# Altium PCB V2.PcbDoc (part 2 of 2)
Units mm, origin at the board's own origin, x right, y up, seen from the top; angles counter-clockwise.
Board outline 100.28 x 60.38 mm, 2 copper layers (Top Layer, Bottom Layer); 71 components, 64 nets, 307 pads, 74 vias.
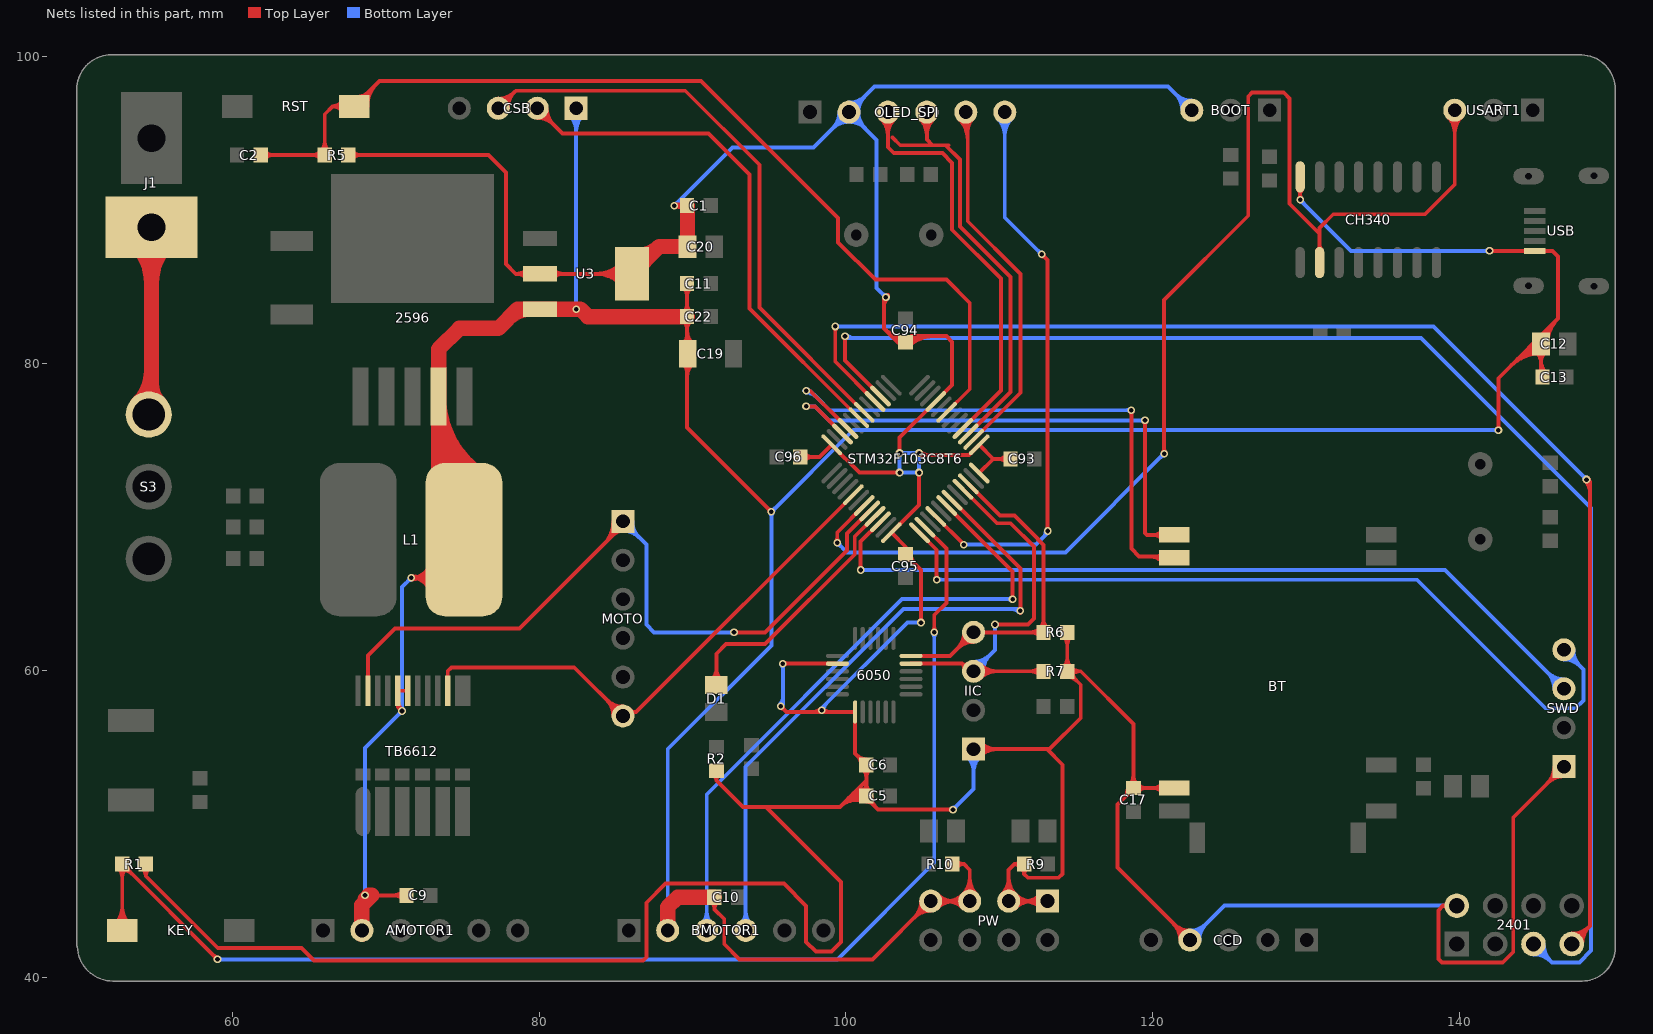
[diagram p2: the nets of this part, all layers, seen from the top]

## Via types
v1: diameter 0.5, hole 0.3, Top Layer to Bottom Layer, 69 vias
v2: diameter 4, hole 3.2, Top Layer to Bottom Layer, 4 vias
v3: diameter 0.4, hole 0.3, Top Layer to Bottom Layer, 1 vias

## Nets (pads, with @x,y where several pads share a name; then routed paths per layer and width w, separated by ;. In a path a pad name is that pad's centre, name@x,y a point inside that pad or via, vN(x,y) a via of type N, cw(c..) or ccw(c..) an arc to the next point about the centre after c; other vN are vias at no path point) (continued)
PA10: CH340.2 STM32F103C8T6.31 USART1.3 | length 94.7
  Top Layer w0.254: v1(99.441,68.326) 99.441,68.988 STM32F103C8T6.31@101.199,70.746 ; v1(120.752,74.129) 120.752,84.15 126.238,89.637 126.238,97.409 126.492,97.663 128.549,97.663 128.93,97.282 128.93,90.424 130.886,88.468 CH340.2@130.886,86.589 130.886,88.849 131.775,89.738 137.749,89.738 139.7,91.689 USART1.3@139.7,96.52 ; USART1.3@139.259,96.079 cw(c138.196,95.016) 139.7,95.016 cw(c141.204,95.016) USART1.3@140.141,96.079 ; USART1.3@139.439,96.259 cw(c138.809,95.629) 139.7,95.629 cw(c140.591,95.629) USART1.3@139.961,96.259 ; 99.441,68.623 cw(c99.144,68.623) 99.354,68.413 ccw(c99.144,68.623) 99.441,68.623 ; 99.441,68.623 ccw(c99.738,68.623) 99.528,68.413 cw(c99.738,68.623) 99.441,68.623 ; 120.752,74.426 cw(c120.455,74.426) 120.665,74.216 ccw(c120.455,74.426) 120.752,74.426 ; 120.752,74.426 ccw(c121.049,74.426) 120.839,74.216 cw(c121.049,74.426) 120.752,74.426 ; CH340.2@130.76,87.426 ccw(c130.457,87.729) 130.886,87.729 ; CH340.2@130.76,87.426 ccw(c130.457,87.729) 130.886,87.729 ; CH340.2@130.76,87.426 ccw(c130.457,87.729) 130.886,87.729 ; CH340.2@130.76,87.426 ccw(c130.457,87.729) 130.886,87.729 ; 130.886,87.729 ccw(c131.315,87.729) CH340.2@131.012,87.426 ; 130.886,87.729 ccw(c131.315,87.729) CH340.2@131.012,87.426 ; 130.886,87.729 ccw(c131.315,87.729) CH340.2@131.012,87.426 ; 130.886,87.729 ccw(c131.315,87.729) CH340.2@131.012,87.426
  Bottom Layer w0.254: v1(99.441,68.326) 100.076,67.691 114.314,67.691 v1(120.752,74.129) ; 99.651,68.116 cw(c99.861,68.326) 99.564,68.326 ccw(c99.861,68.326) 99.651,68.116 ; 99.651,68.116 ccw(c99.441,67.906) 99.441,68.203 cw(c99.441,67.906) 99.651,68.116 ; 120.542,73.919 cw(c120.752,73.709) 120.752,74.006 ccw(c120.752,73.709) 120.542,73.919 ; 120.542,73.919 ccw(c120.332,74.129) 120.629,74.129 cw(c120.332,74.129) 120.542,73.919
PA12: D1.2 STM32F103C8T6.33 | length 18.5
  Top Layer w0.254: D1.2@91.247,59.361 ccw(c90.473,60.135) 91.567,60.135 ccw(c92.661,60.135) D1.2@91.887,59.361 ; D1.2@91.567,59.041 91.567,61.087 92.202,61.722 94.742,61.722 100.584,67.564 100.584,68.717 STM32F103C8T6.33@101.906,70.039
PA15: KEY.1 R1.2 STM32F103C8T6.38 | length 96.6
  Top Layer w0.254: KEY.1@52.391,43.494 ccw(c51.328,44.557) 52.832,44.557 ccw(c54.336,44.557) KEY.1@53.273,43.494 ; KEY.1@52.571,43.314 ccw(c51.941,43.944) 52.832,43.944 ccw(c53.723,43.944) KEY.1@53.093,43.314 ; R1.2@52.585,47.107 cw(c51.989,46.511) 52.832,46.511 ; KEY.1@52.832,43.053 52.832,47.363 R1.2@52.824,47.371 52.832,47.371 v1(59.043,41.16) ; 52.832,46.549 cw(c53.621,46.549) R1.2@53.063,47.107 ; STM32F103C8T6.38@105.159,69.332 106.553,67.938 106.553,64.389 105.766,63.602 v1(105.766,62.484) ; 58.833,41.37 cw(c58.623,41.16) 58.92,41.16 ccw(c58.623,41.16) 58.833,41.37 ; 58.833,41.37 ccw(c59.043,41.58) 59.043,41.283 cw(c59.043,41.58) 58.833,41.37 ; 105.766,62.781 cw(c105.469,62.781) 105.679,62.571 ccw(c105.469,62.781) 105.766,62.781 ; 105.766,62.781 ccw(c106.063,62.781) 105.853,62.571 cw(c106.063,62.781) 105.766,62.781 ; R1.2@52.824,47.008 cw(c52.824,46.112) 53.457,46.746 ccw(c52.824,46.112) R1.2@52.824,47.008 ; R1.2@53.162,47.346 ccw(c53.898,47.346) 53.378,46.825 cw(c53.898,47.346) R1.2@53.162,47.346
  Bottom Layer w0.254: v1(59.043,41.16) 99.453,41.16 105.766,47.473 v1(105.766,62.484) ; 59.34,41.16 cw(c59.34,41.457) 59.13,41.247 ccw(c59.34,41.457) 59.34,41.16 ; 59.34,41.16 ccw(c59.34,40.863) 59.13,41.073 cw(c59.34,40.863) 59.34,41.16 ; 105.766,62.187 cw(c106.063,62.187) 105.853,62.397 ccw(c106.063,62.187) 105.766,62.187 ; 105.766,62.187 ccw(c105.469,62.187) 105.679,62.397 cw(c105.469,62.187) 105.766,62.187
PB0: CSB.3 STM32F103C8T6.18 | length 42.2
  Top Layer w0.254: CSB.3@77.343,96.647 78.486,97.79 89.535,97.79 94.361,92.964 94.361,83.666 STM32F103C8T6.18@101.199,76.828 ; CSB.3@77.343,97.016 ccw(c77.343,97.907) 77.973,97.277 ccw(c78.603,96.647) CSB.3@77.712,96.647 ; CSB.3@77.343,97.27 ccw(c77.343,98.774) 78.407,97.711 ccw(c79.47,96.647) CSB.3@77.966,96.647
PB1: CSB.2 STM32F103C8T6.19 | length 38.2
  Top Layer w0.254: CSB.2@79.883,96.024 cw(c79.883,94.52) 80.947,95.583 cw(c82.01,96.647) CSB.2@80.506,96.647 ; CSB.2@79.883,96.278 cw(c79.883,95.387) 80.513,96.017 cw(c81.143,96.647) CSB.2@80.252,96.647 ; CSB.2@79.883,96.647 81.534,94.996 91.059,94.996 93.726,92.329 93.726,83.593 STM32F103C8T6.19@100.845,76.474
PB4: OLED_SPI.6 STM32F103C8T6.40 | length 44
  Top Layer w0.254: STM32F103C8T6.40@105.866,70.039 105.866,70.029 v1(107.696,68.199) ; v1(112.776,87.122) 113.136,86.762 v1@113.136,69.088 ; 112.986,86.912 cw(c113.196,87.122) 112.899,87.122 ccw(c113.196,87.122) 112.986,86.912 ; 112.986,86.912 ccw(c112.776,86.702) 112.776,86.999 cw(c112.776,86.702) 112.986,86.912 ; 113.136,69.437 ccw(c113.506,69.437) 113.244,69.175 cw(c113.506,69.437) 113.136,69.437
  Bottom Layer w0.254: v1(107.696,68.199) 112.395,68.199 v1@113.157,68.961 ; OLED_SPI.6@109.922,95.952 cw(c108.859,94.889) 110.363,94.889 cw(c111.867,94.889) OLED_SPI.6@110.804,95.952 ; OLED_SPI.6@110.102,96.132 cw(c109.472,95.502) 110.363,95.502 cw(c111.254,95.502) OLED_SPI.6@110.624,96.132 ; OLED_SPI.6@110.363,96.393 110.363,89.535 v1(112.776,87.122) ; 112.566,87.332 cw(c112.356,87.122) 112.653,87.122 ccw(c112.356,87.122) 112.566,87.332 ; 112.566,87.332 ccw(c112.776,87.542) 112.776,87.245 cw(c112.776,87.542) 112.566,87.332 ; 112.857,68.661 ccw(c112.43,69.088) 113.034,69.088 cw(c112.43,69.088) 112.857,68.661
  other v1: 113.157,69.088
PB6: BMOTOR1.3 STM32F103C8T6.42 | length 46.9
  Top Layer w0.254: STM32F103C8T6.42@106.573,70.746 110.871,66.448 v1(110.871,64.643)
  Bottom Layer w0.254: BMOTOR1.3@90.491,43.24 ccw(c89.428,44.303) 90.932,44.303 ccw(c92.436,44.303) BMOTOR1.3@91.373,43.24 ; BMOTOR1.3@90.671,43.06 ccw(c90.041,43.69) 90.932,43.69 ccw(c91.823,43.69) BMOTOR1.3@91.193,43.06 ; BMOTOR1.3@90.932,42.799 90.932,51.899 103.676,64.643 v1(110.871,64.643) ; 110.574,64.643 cw(c110.574,64.346) 110.784,64.556 ccw(c110.574,64.346) 110.574,64.643 ; 110.574,64.643 ccw(c110.574,64.94) 110.784,64.73 cw(c110.574,64.94) 110.574,64.643
PB7: BMOTOR1.4 STM32F103C8T6.43 | length 47.6
  Top Layer w0.254: STM32F103C8T6.43@106.927,71.1 111.379,66.648 v1@111.379,63.754 ; 111.379,64.178 cw(c111.082,64.178) 111.292,63.968 ccw(c111.082,64.178) 111.379,64.178 ; 111.379,64.178 ccw(c111.676,64.178) 111.466,63.968 cw(c111.676,64.178) 111.379,64.178
  Bottom Layer w0.254: BMOTOR1.4@93.031,43.24 ccw(c91.968,44.303) 93.472,44.303 ccw(c94.976,44.303) BMOTOR1.4@93.913,43.24 ; BMOTOR1.4@93.211,43.06 ccw(c92.581,43.69) 93.472,43.69 ccw(c94.363,43.69) BMOTOR1.4@93.733,43.06 ; BMOTOR1.4@93.472,42.799 93.472,53.721 103.759,64.008 111.252,64.008 v1(111.379,63.881) ; 110.775,64.008 cw(c110.775,63.277) v1@111.292,63.794
PC13: OLED_SPI.5 STM32F103C8T6.2 | length 27.5
  Top Layer w0.254: OLED_SPI.5@107.382,95.952 cw(c106.012,94.582) 107.95,94.582 ; OLED_SPI.5@107.562,96.132 cw(c106.626,95.196) 107.95,95.196 cw(c109.02,95.196) OLED_SPI.5@108.264,95.952 ; OLED_SPI.5@107.823,96.393 107.95,96.266 107.95,89.281 111.379,85.852 111.379,78.098 STM32F103C8T6.2@108.341,75.06
PC14: OLED_SPI.4 STM32F103C8T6.3 | length 32.5
  Top Layer w0.254: 103.038,94.742 103.546,94.234 106.712,94.234 ; OLED_SPI.4@104.842,95.952 cw(c103.779,94.889) 105.283,94.889 cw(c106.787,94.889) OLED_SPI.4@105.724,95.952 ; OLED_SPI.4@105.022,96.132 cw(c104.392,95.502) 105.283,95.502 cw(c106.174,95.502) OLED_SPI.4@105.544,96.132 ; OLED_SPI.4@105.283,96.393 105.283,94.615 105.664,94.234 106.509,94.234 107.442,93.301 107.442,88.94 110.744,85.638 110.744,78.159 107.999,75.413 STM32F103C8T6.3@107.987,75.413
PC15: OLED_SPI.3 STM32F103C8T6.4 | length 30.3
  Top Layer w0.254: OLED_SPI.3@102.302,95.952 cw(c101.239,94.889) 102.743,94.889 cw(c104.247,94.889) OLED_SPI.3@103.184,95.952 ; OLED_SPI.3@102.482,96.132 cw(c101.852,95.502) 102.743,95.502 cw(c103.634,95.502) OLED_SPI.3@103.004,96.132 ; OLED_SPI.3@102.743,96.393 102.743,94.107 103.124,93.726 106.299,93.726 106.934,93.091 106.934,88.729 110.109,85.554 110.109,78.242 STM32F103C8T6.4@107.634,75.767
PWMA: MOTO.1 STM32F103C8T6.32 TB6612.23 | length 57.9
  Top Layer w0.254: TB6612.23@68.849,58.674 68.849,60.975 70.612,62.738 78.74,62.738 85.471,69.469 MOTO.1@85.471,69.723 ; 84.228,68.226 ccw(c82.731,69.723) MOTO.1@84.848,69.723 ; 84.661,68.659 ccw(c83.598,69.723) MOTO.1@85.102,69.723 ; 84.841,68.839 cw(c85.471,68.209) MOTO.1@85.471,69.1 ; v1(92.71,62.484) 94.742,62.484 100.076,67.818 100.076,68.916 STM32F103C8T6.32@101.553,70.393 ; 93.007,62.484 cw(c93.007,62.781) 92.797,62.571 ccw(c93.007,62.781) 93.007,62.484 ; 93.007,62.484 ccw(c93.007,62.187) 92.797,62.397 cw(c93.007,62.187) 93.007,62.484
  Bottom Layer w0.254: MOTO.1@85.471,69.1 cw(c85.471,67.596) 86.535,68.659 cw(c87.598,69.723) MOTO.1@86.094,69.723 ; MOTO.1@85.471,69.354 cw(c85.471,68.463) 86.101,69.093 cw(c86.731,69.723) MOTO.1@85.84,69.723 ; MOTO.1@85.471,69.723 86.995,68.199 86.995,62.992 87.503,62.484 v1(92.71,62.484) ; 92.413,62.484 cw(c92.413,62.187) 92.623,62.397 ccw(c92.413,62.187) 92.413,62.484 ; 92.413,62.484 ccw(c92.413,62.781) 92.623,62.571 cw(c92.413,62.781) 92.413,62.484
PWMB: MOTO.6 STM32F103C8T6.29 TB6612.15 | length 39.9
  Top Layer w0.254: TB6612.15@74.049,58.674 74.049,59.952 74.295,60.198 82.296,60.198 MOTO.6@85.471,57.023 85.471,57.277 85.725,57.277 86.315,57.277 ; MOTO.6@84.848,57.023 ccw(c83.344,57.023) 84.407,58.087 ccw(c85.471,59.15) MOTO.6@85.471,57.646 ; MOTO.6@85.102,57.023 ccw(c84.211,57.023) 84.841,57.653 ccw(c85.471,58.283) MOTO.6@85.471,57.392 ; STM32F103C8T6.29@100.492,71.454 86.315,57.277 ; 86.315,57.277 cw(c86.315,57.804) 85.928,57.446 ccw(c86.315,57.804) 86.315,57.277
RST: C2.2 R5.1 RST.2 STM32F103C8T6.7 | length 73.3
  Top Layer w0.254: C2.2@61.857,93.599 R5.1@66.032,93.599 66.032,96.258 66.548,96.774 ; C2.2@62.096,93.36 cw(c62.673,92.783) 62.673,93.599 cw(c62.673,94.415) C2.2@62.096,93.838 ; R5.1@65.793,93.36 ccw(c65.216,92.783) 65.216,93.599 ccw(c65.216,94.415) R5.1@65.793,93.838 ; R5.1@65.793,93.863 ccw(c65.216,94.44) 66.032,94.44 ccw(c66.848,94.44) R5.1@66.271,93.863 ; RST.2@67.172,96.435 ccw(c66.548,96.03) 66.548,96.774 ; RST.2@67.172,97.113 cw(c66.548,97.518) 66.548,96.774 ; RST.2@68.195,97.397 ccw(c68.195,98.297) 68.832,97.661 ; RST.2@68.564,96.774 cw(c70.058,96.774) 69.002,97.831 ; RST.2@68.818,96.774 cw(c70.926,96.774) 69.435,98.264 ; STM32F103C8T6.7@106.573,76.828 108.077,78.332 108.077,83.947 106.553,85.471 101.925,85.471 99.493,87.903 99.493,89.483 90.551,98.425 69.596,98.425 RST.2@67.945,96.774 66.548,96.774
SCL: 6050.23 IIC.3 R7.2 STM32F103C8T6.45 | length 37.4
  Top Layer w0.254: 6050.23@104.254,60.44 107.581,60.44 ; STM32F103C8T6.45@107.634,71.807 109.845,69.596 110.744,69.596 112.268,68.072 112.268,67.173 112.268,63.881 112.268,63.373 111.887,62.992 v1(109.728,62.992) ; IIC.3@108.592,59.683 cw(c109.222,59.053) 109.222,59.944 cw(c109.222,60.835) IIC.3@108.592,60.205 ; IIC.3@108.772,59.503 cw(c109.835,58.44) 109.835,59.944 cw(c109.835,61.448) IIC.3@108.772,60.385 ; R7.2@112.656,59.705 ccw(c112.079,59.128) 112.079,59.944 ccw(c112.079,60.76) R7.2@112.656,60.183 ; R7.2@112.895,59.944 IIC.3@108.331,59.944 108.077,59.944 107.581,60.44 ; 107.581,60.44 cw(c107.246,60.105) 107.715,60.035 ccw(c107.246,60.105) 107.581,60.44 ; 107.581,60.44 ccw(c107.766,60.625) 107.933,60.424 cw(c107.766,60.625) 107.581,60.44
  Bottom Layer w0.254: IIC.3@108.331,59.944 109.728,61.341 v1(109.728,62.992) ; IIC.3@108.331,60.313 ccw(c108.331,61.204) 108.961,60.574 ccw(c109.591,59.944) IIC.3@108.7,59.944 ; IIC.3@108.331,60.567 ccw(c108.331,62.071) 109.395,61.008 ccw(c110.458,59.944) IIC.3@108.954,59.944 ; 109.728,62.695 cw(c110.025,62.695) 109.815,62.905 ccw(c110.025,62.695) 109.728,62.695 ; 109.728,62.695 ccw(c109.431,62.695) 109.641,62.905 cw(c109.431,62.695) 109.728,62.695
SDA: 6050.24 IIC.4 R6.2 STM32F103C8T6.46 | length 27.9
  Top Layer w0.254: 6050.24@104.254,60.94 106.787,60.94 IIC.4@108.331,62.484 R6.2@112.895,62.484 112.895,67.253 112.895,68.163 112.526,68.532 112.526,68.576 110.998,70.104 110.044,70.104 STM32F103C8T6.46@107.987,72.161 ; IIC.4@107.708,62.484 cw(c106.204,62.484) 107.267,61.42 cw(c108.331,60.357) IIC.4@108.331,61.861 ; IIC.4@107.962,62.484 cw(c107.071,62.484) 107.701,61.854 cw(c108.331,61.224) IIC.4@108.331,62.115 ; R6.2@112.656,62.245 ccw(c112.079,61.668) 112.079,62.484 ccw(c112.079,63.3) R6.2@112.656,62.723 ; R6.2@112.656,62.748 ccw(c112.079,63.325) 112.895,63.325 ccw(c113.711,63.325) R6.2@113.134,62.748
SPI1_MISO: 2401.7 STM32F103C8T6.16 | length 99
  Top Layer w0.254: v1(99.314,82.423) 99.314,80.127 STM32F103C8T6.16@101.906,77.535 ; 2401.7@147.327,42.164 148.508,43.345 148.508,72.218 ; 2401.7@147.327,42.583 ccw(c147.327,43.595) 148.042,42.879 ccw(c148.758,42.164) 2401.7@147.746,42.164 ; 2401.7@147.327,42.837 ccw(c147.327,44.462) 148.476,43.313 ccw(c149.625,42.164) 2401.7@148,42.164 ; v1@148.198,72.354 cw(c147.45,71.606) 148.508,71.606 ; v1(148.285,72.441) 148.508,72.218 ; v1@148.378,72.533 cw(c148.064,72.219) 148.508,72.219 ; 99.314,82.126 cw(c99.611,82.126) 99.401,82.336 ccw(c99.611,82.126) 99.314,82.126 ; 99.314,82.126 ccw(c99.017,82.126) 99.227,82.336 cw(c99.017,82.126) 99.314,82.126 ; 148.495,72.231 cw(c148.705,72.441) 148.408,72.441 ccw(c148.705,72.441) 148.495,72.231 ; 148.495,72.231 ccw(c148.285,72.021) 148.285,72.318 cw(c148.285,72.021) 148.495,72.231
  Bottom Layer w0.254: v1(99.314,82.423) 138.303,82.423 v1(148.285,72.441) ; 99.611,82.423 cw(c99.611,82.72) 99.401,82.51 ccw(c99.611,82.72) 99.611,82.423 ; 99.611,82.423 ccw(c99.611,82.126) 99.401,82.336 cw(c99.611,82.126) 99.611,82.423 ; 148.075,72.651 cw(c147.865,72.441) 148.162,72.441 ccw(c147.865,72.441) 148.075,72.651 ; 148.075,72.651 ccw(c148.285,72.861) 148.285,72.564 cw(c148.285,72.861) 148.075,72.651
SPI1_SCK: 2401.5 STM32F103C8T6.15 | length 97.9
  Top Layer w0.254: v1@99.949,81.661 99.949,80.199 STM32F103C8T6.15@102.26,77.888 ; 99.949,81.491 cw(c100.246,81.491) 100.036,81.701 ccw(c100.246,81.491) 99.949,81.491 ; 99.949,81.491 ccw(c99.652,81.491) 99.862,81.701 cw(c99.652,81.491) 99.949,81.491
  Bottom Layer w0.254: v1(99.949,81.788) 100.068,81.669 137.508,81.669 148.59,70.587 148.59,41.732 147.828,40.97 146.021,40.97 2401.5@144.827,42.164 ; v1@100.033,81.698 cw(c100.182,81.537) 100.292,81.727 ; 2401.5@144.827,41.491 cw(c144.827,39.866) 145.976,41.015 cw(c147.125,42.164) 2401.5@145.5,42.164 ; 2401.5@144.827,41.745 cw(c144.827,40.733) 145.542,41.449 cw(c146.258,42.164) 2401.5@145.246,42.164 ; v1@100.036,81.875 ccw(c100.533,82.372) 100.533,81.669 cw(c100.533,82.372) v1@100.036,81.875
SWCLK: STM32F103C8T6.37 SWD.4 | length 58.8
  Top Layer w0.254: STM32F103C8T6.37@104.805,68.979 105.918,67.866 v1(105.918,65.913) ; 105.918,66.21 cw(c105.621,66.21) 105.831,66 ccw(c105.621,66.21) 105.918,66.21 ; 105.918,66.21 ccw(c106.215,66.21) 106.005,66 cw(c106.215,66.21) 105.918,66.21
  Bottom Layer w0.254: v1(105.918,65.913) 137.236,65.913 145.618,57.531 147.574,57.531 148.082,58.039 148.082,60.071 SWD.4@146.812,61.341 ; SWD.4@146.812,60.718 cw(c146.812,59.214) 147.876,60.277 cw(c148.939,61.341) SWD.4@147.435,61.341 ; SWD.4@146.812,60.972 cw(c146.812,60.081) 147.442,60.711 cw(c148.072,61.341) SWD.4@147.181,61.341 ; 106.215,65.913 cw(c106.215,66.21) 106.005,66 ccw(c106.215,66.21) 106.215,65.913 ; 106.215,65.913 ccw(c106.215,65.616) 106.005,65.826 cw(c106.215,65.616) 106.215,65.913
SWDIO: STM32F103C8T6.34 SWD.3 | length 58.4
  Top Layer w0.254: v1(100.965,66.548) 100.965,68.391 STM32F103C8T6.34@102.26,69.686 ; 100.965,66.845 cw(c100.668,66.845) 100.878,66.635 ccw(c100.668,66.845) 100.965,66.845 ; 100.965,66.845 ccw(c101.262,66.845) 101.052,66.635 cw(c101.262,66.845) 100.965,66.845
  Bottom Layer w0.254: v1(100.965,66.548) 139.065,66.548 SWD.3@146.812,58.801 ; SWD.3@146.189,58.801 ccw(c144.685,58.801) 145.748,59.865 ccw(c146.812,60.928) SWD.3@146.812,59.424 ; SWD.3@146.443,58.801 ccw(c145.552,58.801) 146.182,59.431 ccw(c146.812,60.061) SWD.3@146.812,59.17 ; 101.262,66.548 cw(c101.262,66.845) 101.052,66.635 ccw(c101.262,66.845) 101.262,66.548 ; 101.262,66.548 ccw(c101.262,66.251) 101.052,66.461 cw(c101.262,66.251) 101.262,66.548
USART3_RX: BT.1 STM32F103C8T6.22 | length 40.8
  Top Layer w0.254: v1@97.282,77.216 97.982,77.216 STM32F103C8T6.22@100.166,75.032 ; v1(119.507,76.302) 119.507,68.961 119.634,68.834 BT.1@121.412,68.834 ; BT.1@120.648,68.57 ccw(c120.011,67.934) 120.011,68.834 ccw(c120.011,69.734) BT.1@120.648,69.098 ; 97.706,77.216 cw(c97.706,77.513) 97.496,77.303 ccw(c97.706,77.513) 97.706,77.216 ; 97.706,77.216 ccw(c97.706,76.919) 97.496,77.129 cw(c97.706,76.919) 97.706,77.216 ; 119.507,76.005 cw(c119.804,76.005) 119.594,76.215 ccw(c119.804,76.005) 119.507,76.005 ; 119.507,76.005 ccw(c119.21,76.005) 119.42,76.215 cw(c119.21,76.005) 119.507,76.005
  Bottom Layer w0.254: v1@97.282,77.216 97.982,77.216 98.897,76.302 v1(119.507,76.302) ; 97.706,77.216 cw(c97.706,77.513) 97.496,77.303 ccw(c97.706,77.513) 97.706,77.216 ; 97.706,77.216 ccw(c97.706,76.919) 97.496,77.129 cw(c97.706,76.919) 97.706,77.216 ; 119.21,76.302 cw(c119.21,76.005) 119.42,76.215 ccw(c119.21,76.005) 119.21,76.302 ; 119.21,76.302 ccw(c119.21,76.599) 119.42,76.389 cw(c119.21,76.599) 119.21,76.302
  other v1: 97.409,77.216
USART3_TX: BT.2 STM32F103C8T6.21 | length 44.2
  Top Layer w0.254: v1(97.414,78.232) 97.673,78.232 STM32F103C8T6.21@100.138,75.767 ; v1(118.618,76.962) 118.618,69.596 118.618,67.945 119.126,67.437 121.309,67.437 BT.2@121.412,67.334 ; 119.763,67.437 cw(c119.763,66.185) BT.2@120.648,67.07 ; 120.26,67.437 ccw(c120.26,67.986) BT.2@120.648,67.598 ; 120.376,67.437 cw(c120.376,66.798) BT.2@120.828,67.25 ; 118.618,76.665 cw(c118.915,76.665) 118.705,76.875 ccw(c118.915,76.665) 118.618,76.665 ; 118.618,76.665 ccw(c118.321,76.665) 118.531,76.875 cw(c118.321,76.665) 118.618,76.665
  Bottom Layer w0.254: v1@97.282,78.232 97.673,78.232 ; v1@97.521,78.294 ccw(c98.129,78.645) 97.947,77.966 ; v1(118.618,76.962) 98.955,76.962 98.193,77.724 98.181,77.724 97.673,78.232 ; 97.673,78.232 cw(c97.673,78.443) 97.509,78.31 ccw(c97.673,78.443) 97.673,78.232 ; 97.673,78.232 ccw(c97.673,78.021) 97.509,78.154 cw(c97.673,78.021) 97.673,78.232 ; 118.321,76.962 cw(c118.321,76.665) 118.531,76.875 ccw(c118.321,76.665) 118.321,76.962 ; 118.321,76.962 ccw(c118.321,77.259) 118.531,77.049 cw(c118.321,77.259) 118.321,76.962 ; v1@97.414,78.109 cw(c97.414,77.187) 98.066,77.839 ccw(c97.414,77.187) v1@97.414,78.109
VBAT: J1.1 S3.1 | length 21.7
  Top Layer w1: J1.1@53.676,87.839 cw(c51.116,85.279) 54.737,85.279 cw(c58.358,85.279) J1.1@55.798,87.839 ; S3.1@53.852,77.39 ccw(c51.716,79.526) 54.737,79.526 ; S3.1@54.559,76.683 ccw(c54.13,77.112) 54.737,77.112 J1.1@54.737,88.9 ; 54.737,78.668 ccw(c56.544,78.668) S3.1@55.266,77.39
VCC3V3: 2401.2 6050.8 6050.13 BOOT.3 BT.12 C1.2 C5.2 C6.2 C17.2 C20.1 C93.2 C94.2 C95.2 C96.2 CCD.4 IIC.1 OLED_SPI.2 PW.1 PW.3 R1.1 R2.2 R5.2 R6.1 R7.1 R9.2 STM32F103C8T6.1 STM32F103C8T6.9 STM32F103C8T6.24 STM32F103C8T6.36 STM32F103C8T6.48 SWD.1 U3.2 | length 500.5
  Top Layer w0.254: R1.1@54.364,47.371 54.364,46.601 ; R5.2@67.572,93.599 76.708,93.599 77.851,92.456 77.851,86.487 78.486,85.852 U3.2@80.058,85.852 U3.2@86.058,85.852 ; R5.2@67.811,93.36 cw(c68.388,92.783) 68.388,93.599 cw(c68.388,94.415) R5.2@67.811,93.838 ; U3.2@79.194,85.588 ccw(c78.558,84.952) 78.558,85.852 ccw(c78.558,86.752) U3.2@79.194,86.116 ; U3.2@80.922,85.588 cw(c81.559,84.952) 81.559,85.852 cw(c81.559,86.752) U3.2@80.922,86.116 ; U3.2@85.37,85.164 ccw(c83.709,83.503) 83.709,85.852 ccw(c83.709,88.201) U3.2@85.37,86.54 ; U3.2@85.55,85.344 ccw(c84.322,84.116) 84.322,85.852 ccw(c84.322,87.588) U3.2@85.55,86.36 ; U3.2@85.729,85.523 ccw(c84.935,84.729) 84.935,85.852 ccw(c84.935,86.975) U3.2@85.729,86.181 ; v1(88.824,90.297) C1.2@89.654,90.297 ; R2.2@91.567,53.459 91.567,52.832 ; v1@95.758,57.535 cw(c95.758,57.238) 95.968,57.448 cw(c96.178,57.658) v1@95.881,57.658 ; v1@95.885,57.531 96.139,57.277 98.298,57.277 v1(98.425,57.404) 98.539,57.29 6050.13@100.604,57.29 100.604,54.582 C6.2@101.338,53.848 ; v1(95.897,60.44) 6050.8@99.454,60.44 ; v1@95.984,60.353 cw(c96.194,60.143) 96.194,60.44 cw(c96.194,60.737) v1@95.984,60.527 ; C96.2@97.036,73.914 98.285,73.914 STM32F103C8T6.24@99.078,74.706 100.886,72.898 v1(103.505,72.898) ; C96.2@97.275,73.675 cw(c97.852,73.098) 97.852,73.914 cw(c97.852,74.73) C96.2@97.275,74.153 ; 97.821,57.277 ccw(c97.821,58.008) v1@98.338,57.491 ; v1@98.512,57.491 ccw(c98.997,57.976) 98.997,57.29 ; 99.896,51.39 cw(c100.859,50.428) C5.2@101.31,51.712 ; 100.182,51.676 cw(c101.007,50.85) C5.2@101.394,51.951 ; 100.467,51.961 cw(c101.156,51.272) C5.2@101.479,52.191 ; 100.718,54.468 ccw(c101.338,55.087) C6.2@101.338,54.211 ; 100.779,54.407 cw(c100.244,53.873) C6.2@101,53.873 ; C5.2@101.226,51.472 ccw(c100.71,50.006) 99.611,51.105 ; C5.2@101.338,51.453 cw(c101.338,50.864) 101.755,51.28 ; C5.2@101.676,51.791 ccw(c102.719,51.791) 101.982,51.053 ; 102.489,83.724 cw(c103.22,83.724) v1@102.703,84.241 ; v1@102.756,84.468 102.489,84.201 102.489,82.288 ; 102.912,81.865 ccw(c103.835,82.789) C94.2@103.859,81.483 ; 102.997,81.78 ccw(c103.401,82.184) C94.2@103.69,81.691 ; 103.23,81.547 ccw(c103.573,81.891) C94.2@103.819,81.472 ; 103.334,81.443 ccw(c103.851,81.959) C94.2@103.864,81.229 ; v1(103.505,74.168) 103.505,75.174 STM32F103C8T6.9@105.866,77.535 106.934,78.603 106.934,81.407 106.553,81.788 104.275,81.788 C94.2@103.886,81.399 103.378,81.399 ; C94.2@103.791,81.519 cw(c104.44,80.87) 104.44,81.788 ; C94.2@103.855,81.737 cw(c103.82,83.619) 102.489,82.288 ; C94.2@103.97,81.34 cw(c105.053,80.257) 105.053,81.788 ; C94.2@104.15,81.16 cw(c105.666,79.644) 105.666,81.788 ; v1(104.775,72.898) 104.775,70.787 STM32F103C8T6.36@102.967,68.979 103.886,68.059 ; v1(104.775,74.168) 104.902,74.041 108.029,74.041 STM32F103C8T6.1@108.694,74.706 ; v1@104.862,74.255 ccw(c105.379,74.772) 105.379,74.041 ; v1(104.902,63.119) 104.902,66.556 C95.2@103.886,67.572 103.886,68.059 ; v1(106.985,50.927) 102.108,50.927 101.338,51.697 C5.2@101.338,51.816 ; STM32F103C8T6.48@108.694,72.868 109.614,73.787 ; STM32F103C8T6.1@108.709,74.691 109.614,73.787 ; PW.3@110.176,45.399 ccw(c109.113,46.462) 110.617,46.462 ccw(c112.121,46.462) 111.058,45.399 ccw(c112.121,46.462) 112.121,44.958 ccw(c112.121,43.454) PW.3@111.058,44.517 ; PW.3@110.356,45.219 ccw(c109.726,45.849) 110.617,45.849 ccw(c111.508,45.849) 110.878,45.219 ccw(c111.508,45.849) 111.508,44.958 ccw(c111.508,44.067) PW.3@110.878,44.697 ; C93.2@110.497,73.548 ccw(c109.92,72.971) 109.92,73.787 ccw(c109.92,74.603) C93.2@110.497,74.026 ; C93.2@110.736,73.787 109.614,73.787 ; PW.1@112.716,44.517 ccw(c111.653,43.454) 111.653,44.958 ccw(c111.653,46.462) PW.1@112.716,45.399 ; PW.1@112.896,44.697 ccw(c112.266,44.067) 112.266,44.958 ccw(c112.266,45.849) PW.1@112.896,45.219 ; PW.1@113.157,44.958 PW.3@110.617,44.958 110.617,46.99 110.998,47.371 ; R7.1@114.196,60.208 ccw(c113.619,60.785) 114.435,60.785 ccw(c115.251,60.785) R7.1@114.674,60.208 ; R6.1@114.196,62.22 cw(c113.619,61.643) 114.435,61.643 cw(c115.251,61.643) R6.1@114.674,62.22 ; R7.1@114.435,59.581 cw(c114.435,58.705) 115.055,59.324 ; R6.1@114.435,62.484 R7.1@114.435,59.944 ; R7.1@114.773,59.919 ccw(c115.529,59.919) 114.994,59.385 ; 118.109,51.672 ccw(c117.449,52.332) C17.2@118.382,52.332 ; 118.226,51.789 cw(c118.72,51.295) C17.2@118.72,51.994 ; C17.2@118.506,52.571 ccw(c117.929,53.148) 118.745,53.148 ccw(c119.561,53.148) C17.2@118.984,52.571 ; CCD.4@121.805,42.418 ccw(c120.301,42.418) 121.364,43.482 ccw(c122.428,44.545) CCD.4@122.428,43.041 ; CCD.4@122.059,42.418 ccw(c121.168,42.418) 121.798,43.048 ccw(c122.428,43.678) CCD.4@122.428,42.787 ; CCD.4@122.428,42.418 117.704,47.142 117.704,51.267 118.77,52.334 BT.12@121.412,52.334 118.747,52.334 C17.2@118.745,52.332 118.745,56.515 115.316,59.944 R7.1@114.435,59.944 ; 2401.2@139.827,44.664 138.938,44.664 ; SWD.1@146.189,53.721 cw(c144.685,53.721) 145.748,52.657 cw(c146.812,51.594) SWD.1@146.812,53.098 ; SWD.1@146.443,53.721 cw(c145.552,53.721) 146.182,53.091 cw(c146.812,52.461) SWD.1@146.812,53.352 ; SWD.1@146.812,53.721 143.51,50.419 143.51,41.656 142.824,40.97 138.862,40.97 138.633,41.199 138.633,44.359 138.938,44.664 ; 54.364,46.601 cw(c55.016,46.601) 54.587,47.092 ccw(c55.016,46.601) 54.364,46.601 ; 54.364,46.601 ccw(c53.712,46.601) 54.141,47.092 cw(c53.712,46.601) 54.364,46.601 ; 54.364,46.601 59.055,41.91 64.516,41.91 65.329,41.097 86.792,41.097 86.995,41.3 86.995,44.856 88.24,46.101 95.961,46.101 97.409,44.653 97.409,42.303 98.044,41.668 99.06,41.668 99.695,42.303 99.695,46.195 94.785,51.105 ; v1@88.838,90.297 cw(c88.838,89.481) 89.415,90.058 ccw(c88.838,89.481) v1@88.838,90.297 ; v1@88.838,90.297 ccw(c88.838,91.113) 89.415,90.536 cw(c88.838,91.113) v1@88.838,90.297 ; v1@88.885,90.19 cw(c89.04,89.922) 89.12,90.221 ; v1@88.885,90.19 cw(c89.04,89.922) 89.12,90.221 ; v1@88.885,90.19 cw(c89.04,89.922) 89.12,90.221 ; v1@88.885,90.404 ccw(c89.04,90.672) 89.12,90.373 ; v1@88.885,90.404 ccw(c89.04,90.672) 89.12,90.373 ; v1@88.885,90.404 ccw(c89.04,90.672) 89.12,90.373 ; v1@88.93,90.236 cw(c89.177,90.093) 89.103,90.368 ; v1@88.93,90.236 cw(c89.177,90.093) 89.103,90.368 ; v1@88.93,90.236 cw(c89.177,90.093) 89.103,90.368 ; v1@88.93,90.358 ccw(c89.177,90.501) 89.103,90.226 ; v1@88.93,90.358 ccw(c89.177,90.501) 89.103,90.226 ; v1@88.93,90.358 ccw(c89.177,90.501) 89.103,90.226 ; 89.121,90.297 cw(c89.121,90.594) 88.911,90.384 ccw(c89.121,90.594) 89.121,90.297 ; 89.121,90.297 ccw(c89.121,90) 88.911,90.21 cw(c89.121,90) 89.121,90.297 ; 91.567,52.832 cw(c91.979,52.832) 91.753,53.177 ccw(c91.979,52.832) 91.567,52.832 ; 91.567,52.832 ccw(c91.155,52.832) 91.381,53.177 cw(c91.155,52.832) 91.567,52.832 ; 91.567,52.832 93.294,51.105 94.785,51.105 ; 94.785,51.105 99.611,51.105 ; 99.611,51.105 101.338,52.832 ; C5.2@101.099,52.08 ccw(c100.522,52.657) 101.338,52.657 ; C5.2@101.099,52.08 ccw(c100.522,52.657) 101.338,52.657 ; C5.2@101.099,52.08 ccw(c100.522,52.657) 101.338,52.657 ; C5.2@101.099,52.08 ccw(c100.522,52.657) 101.338,52.657 ; C6.2@101.099,53.584 cw(c100.522,53.007) 101.338,53.007 ; C6.2@101.099,53.584 cw(c100.522,53.007) 101.338,53.007 ; C6.2@101.099,53.584 cw(c100.522,53.007) 101.338,53.007 ; C6.2@101.099,53.584 cw(c100.522,53.007) 101.338,53.007 ; C5.2@101.338,51.816 C6.2@101.338,53.848 ; C5.2@101.338,51.816 101.338,52.832 ; 101.338,52.657 ccw(c102.154,52.657) C5.2@101.577,52.08 ; 101.338,52.657 ccw(c102.154,52.657) C5.2@101.577,52.08 ; 101.338,52.657 ccw(c102.154,52.657) C5.2@101.577,52.08 ; 101.338,52.657 ccw(c102.154,52.657) C5.2@101.577,52.08 ; 101.338,52.832 C6.2@101.338,53.848 ; 101.338,53.007 cw(c102.154,53.007) C6.2@101.577,53.584 ; 101.338,53.007 cw(c102.154,53.007) C6.2@101.577,53.584 ; 101.338,53.007 cw(c102.154,53.007) C6.2@101.577,53.584 ; 101.338,53.007 cw(c102.154,53.007) C6.2@101.577,53.584 ; 102.489,82.288 103.378,81.399 ; 103.208,72.898 cw(c103.208,72.601) 103.418,72.811 ccw(c103.208,72.601) 103.208,72.898 ; 103.208,72.898 ccw(c103.208,73.195) 103.418,72.985 cw(c103.208,73.195) 103.208,72.898 ; 103.378,81.399 cw(c103.378,81.223) 103.543,81.283 ccw(c103.378,81.223) 103.378,81.399 ; 103.378,81.399 ccw(c103.378,81.575) 103.543,81.515 cw(c103.378,81.575) 103.378,81.399 ; 103.505,74.465 cw(c103.208,74.465) 103.418,74.255 ccw(c103.208,74.465) 103.505,74.465 ; 103.505,74.465 ccw(c103.802,74.465) 103.592,74.255 cw(c103.802,74.465) 103.505,74.465 ; 103.886,68.059 cw(c103.704,68.059) 103.768,67.889 ccw(c103.704,68.059) 103.886,68.059 ; 103.886,68.059 ccw(c104.068,68.059) 104.004,67.889 cw(c104.068,68.059) 103.886,68.059 ; 104.775,72.601 cw(c105.072,72.601) 104.862,72.811 ccw(c105.072,72.601) 104.775,72.601 ; 104.775,72.601 ccw(c104.478,72.601) 104.688,72.811 cw(c104.478,72.601) 104.775,72.601 ; 104.902,63.416 cw(c104.605,63.416) 104.815,63.206 ccw(c104.605,63.416) 104.902,63.416 ; 104.902,63.416 ccw(c105.199,63.416) 104.989,63.206 cw(c105.199,63.416) 104.902,63.416 ; 106.688,50.927 cw(c106.688,50.63) 106.898,50.84 ccw(c106.688,50.63) 106.688,50.927 ; 106.688,50.927 ccw(c106.688,51.224) 106.898,51.014 cw(c106.688,51.224) 106.688,50.927 ; 109.222,54.864 cw(c109.222,55.755) 108.592,55.125 ccw(c109.222,55.755) 109.222,54.864 ; 109.222,54.864 ccw(c109.222,53.973) 108.592,54.603 cw(c109.222,53.973) 109.222,54.864 ; 109.835,54.864 cw(c109.835,56.368) 108.772,55.305 ccw(c109.835,56.368) 109.835,54.864 ; 109.835,54.864 ccw(c109.835,53.36) 108.772,54.423 cw(c109.835,53.36) 109.835,54.864 ; 110.998,47.371 cw(c110.998,46.959) 111.343,47.185 ccw(c110.998,46.959) 110.998,47.371 ; 110.998,47.371 ccw(c110.998,47.783) 111.343,47.557 cw(c110.998,47.783) 110.998,47.371 ; 110.998,47.371 R9.2@111.625,47.371 111.625,46.736 ; 111.625,46.736 cw(c112.006,46.736) 111.804,47.059 ccw(c112.006,46.736) 111.625,46.736 ; 111.625,46.736 ccw(c111.244,46.736) 111.446,47.059 cw(c111.244,46.736) 111.625,46.736 ; 111.625,46.736 111.879,46.482 113.868,46.482 114.122,46.736 114.122,53.848 113.106,54.864 IIC.1@108.331,54.864 113.284,54.864 115.316,56.896 115.316,59.063 R7.1@114.435,59.944 ; 115.251,59.944 cw(c115.251,60.76) 114.674,60.183 ccw(c115.251,60.76) 115.251,59.944 ; 115.251,59.944 ccw(c115.251,59.128) 114.674,59.705 cw(c115.251,59.128) 115.251,59.944 ; 120.011,52.334 cw(c120.011,51.434) 120.648,52.07 ccw(c120.011,51.434) 120.011,52.334 ; 120.011,52.334 ccw(c120.011,53.235) 120.648,52.598 cw(c120.011,53.235) 120.011,52.334 ; 138.938,44.664 cw(c138.938,44.413) 139.179,44.481 ccw(c138.938,44.413) 138.938,44.664 ; 138.938,44.664 ccw(c138.938,44.915) 139.179,44.847 cw(c138.938,44.915) 138.938,44.664 ; C95.2@103.911,67.234 cw(c103.911,66.478) 104.445,67.013 ccw(c103.911,66.478) C95.2@103.911,67.234 ; C95.2@104.249,67.572 ccw(c105.125,67.572) 104.506,66.952 cw(c105.125,67.572) C95.2@104.249,67.572 ; C17.2@119.009,52.093 cw(c119.591,51.511) 119.591,52.334 ccw(c119.591,51.511) C17.2@119.009,52.093 ; C17.2@119.009,52.571 ccw(c119.581,53.143) 119.581,52.334 cw(c119.581,53.143) C17.2@119.009,52.571
  Top Layer w1: U3.2@86.058,85.852 87.836,87.63 ; U3.2@86.158,87.094 ccw(c86.477,88.989) 87.836,87.63 ; C1.2@89.654,90.297 89.676,90.275 C20.1@89.676,87.63 87.836,87.63
  Bottom Layer w0.254: v1(88.824,90.297) 92.608,94.082 97.892,94.082 OLED_SPI.2@100.203,96.393 ; v1@95.671,57.745 ccw(c95.126,58.29) 95.897,58.29 ; v1(95.758,57.658) 95.897,57.797 v1(95.897,60.44) ; v1@95.81,60.353 cw(c95.6,60.143) 95.897,60.143 cw(c96.194,60.143) v1@95.984,60.353 ; v1@98.361,57.468 104.013,63.119 v1(104.902,63.119) ; v1@98.548,57.404 cw(c99.152,57.404) 98.725,57.831 ; OLED_SPI.2@99.58,96.393 cw(c98.076,96.393) 99.139,95.329 cw(c100.203,94.266) 100.203,95.77 cw(c100.203,94.266) 101.267,95.329 cw(c102.33,96.393) 100.826,96.393 cw(c102.33,96.393) 101.267,97.457 cw(c100.203,98.52) OLED_SPI.2@100.203,97.016 ; OLED_SPI.2@99.834,96.393 cw(c98.943,96.393) 99.573,95.763 cw(c100.203,95.133) 100.203,96.024 cw(c100.203,95.133) 100.833,95.763 cw(c101.463,96.393) 100.572,96.393 cw(c101.463,96.393) 100.833,97.023 cw(c100.203,97.653) OLED_SPI.2@100.203,96.762 ; v1@102.493,84.328 ccw(c102.196,84.328) 102.406,84.538 ccw(c102.616,84.748) v1@102.616,84.451 ; v1@102.718,84.226 102.006,84.938 102.006,94.59 OLED_SPI.2@100.203,96.393 ; v1(103.505,74.168) v1(103.505,72.898) v1(104.775,72.898) v1(104.775,74.168) 103.759,74.168 ; v1(106.985,50.927) 108.331,52.273 IIC.1@108.331,54.864 ; IIC.1@107.89,54.423 cw(c106.827,53.36) 108.331,53.36 cw(c109.835,53.36) IIC.1@108.772,54.423 ; IIC.1@108.07,54.603 cw(c107.44,53.973) 108.331,53.973 cw(c109.222,53.973) IIC.1@108.592,54.603 ; BOOT.3@121.932,96.52 ccw(c120.428,96.52) 121.491,97.584 ccw(c122.555,98.647) BOOT.3@122.555,97.143 ; BOOT.3@122.186,96.52 ccw(c121.295,96.52) 121.925,97.15 ccw(c122.555,97.78) BOOT.3@122.555,96.889 ; CCD.4@122.428,42.418 124.674,44.664 2401.2@139.827,44.664 ; CCD.4@122.428,42.787 ccw(c122.428,43.678) 123.058,43.048 ccw(c123.688,42.418) CCD.4@122.797,42.418 ; CCD.4@122.428,43.041 ccw(c122.428,44.545) 123.492,43.482 ccw(c124.555,42.418) CCD.4@123.051,42.418 ; BOOT.3@122.555,96.52 121.006,98.069 101.879,98.069 OLED_SPI.2@100.203,96.393 ; 89.034,90.507 cw(c88.824,90.717) 88.824,90.42 ccw(c88.824,90.717) 89.034,90.507 ; 89.034,90.507 ccw(c89.244,90.297) 88.947,90.297 cw(c89.244,90.297) 89.034,90.507 ; 103.505,73.195 cw(c103.208,73.195) 103.418,72.985 ccw(c103.208,73.195) 103.505,73.195 ; 103.505,73.195 ccw(c103.802,73.195) v1@103.592,72.985 ; 103.505,73.195 ccw(c103.802,73.195) v1@103.592,72.985 ; 103.505,73.871 cw(c103.802,73.871) v1@103.592,74.081 ; 103.505,73.871 ccw(c103.208,73.871) 103.418,74.081 cw(c103.208,73.871) 103.505,73.871 ; 103.505,73.871 cw(c103.802,73.871) v1@103.592,74.081 ; v1@103.592,72.985 ccw(c103.802,73.195) 103.802,72.898 ; v1@103.592,72.985 ccw(c103.802,73.195) 103.802,72.898 ; v1@103.592,74.081 cw(c103.802,73.871) 103.802,74.168 ; v1@103.592,74.081 cw(c103.802,73.871) 103.802,74.168 ; 103.759,74.168 cw(c103.759,74.369) 103.601,74.244 ccw(c103.759,74.369) 103.759,74.168 ; 103.759,74.168 ccw(c103.759,73.967) 103.601,74.092 cw(c103.759,73.967) 103.759,74.168 ; 103.802,72.898 ccw(c103.802,72.601) 103.592,72.811 cw(c103.802,72.601) 103.802,72.898 ; 103.802,74.168 cw(c103.802,74.465) 103.592,74.255 ccw(c103.802,74.465) 103.802,74.168 ; 104.478,72.898 cw(c104.478,72.601) 104.688,72.811 ccw(c104.478,72.601) 104.478,72.898 ; 104.478,72.898 ccw(c104.478,73.195) v1@104.688,72.985 ; 104.478,72.898 ccw(c104.478,73.195) v1@104.688,72.985 ; 104.478,74.168 cw(c104.478,73.871) v1@104.688,74.081 ; 104.478,74.168 ccw(c104.478,74.465) 104.688,74.255 cw(c104.478,74.465) 104.478,74.168 ; 104.478,74.168 cw(c104.478,73.871) v1@104.688,74.081 ; 104.605,63.119 cw(c104.605,62.822) 104.815,63.032 ccw(c104.605,62.822) 104.605,63.119 ; 104.605,63.119 ccw(c104.605,63.416) 104.815,63.206 cw(c104.605,63.416) 104.605,63.119 ; v1@104.688,72.985 ccw(c104.478,73.195) 104.775,73.195 ; v1@104.688,72.985 ccw(c104.478,73.195) 104.775,73.195 ; v1@104.688,74.081 cw(c104.478,73.871) 104.775,73.871 ; v1@104.688,74.081 cw(c104.478,73.871) 104.775,73.871 ; 104.775,73.195 ccw(c105.072,73.195) 104.862,72.985 cw(c105.072,73.195) 104.775,73.195 ; 104.775,73.871 cw(c105.072,73.871) 104.862,74.081 ccw(c105.072,73.871) 104.775,73.871 ; 107.195,51.137 cw(c106.985,51.347) 106.985,51.05 ccw(c106.985,51.347) 107.195,51.137 ; 107.195,51.137 ccw(c107.405,50.927) 107.108,50.927 cw(c107.405,50.927) 107.195,51.137
  other v1: 102.616,84.328
VCC5V: 2596.4 AMOTOR1.2 BMOTOR1.2 C9.1 C10.1 C11.2 C12.2 C13.1 C19.1 C22.2 CH340.16 CSB.1 L1.2 PW.5 PW.7 R10.2 TB6612.19 TB6612.20 U3.3 USB.1 | length 370.3
  Top Layer w0.254: v1(68.656,45.339) 69.088,45.339 C9.1@71.366,45.339 ; TB6612.20@70.775,57.807 cw(c70.638,57.57) 70.903,57.641 ; v1(71.069,57.353) 70.799,57.623 TB6612.20@70.799,58.674 TB6612.19@71.449,58.674 ; v1@71.74,65.933 cw(c71.889,65.676) 71.966,65.963 ; v1@71.74,66.147 ccw(c71.889,66.404) 71.966,66.117 ; v1@71.785,65.979 cw(c72.042,65.83) 71.966,66.117 ; v1@71.785,66.102 ccw(c72.042,66.25) 71.966,65.963 ; 72.044,66.04 cw(c72.044,64.891) L1.2@73.122,65.291 ; 72.048,66.04 ccw(c72.048,67.196) L1.2@73.128,66.784 ; 72.41,66.04 cw(c72.41,65.027) L1.2@73.36,65.38 ; 72.416,66.04 ccw(c72.416,67.056) L1.2@73.365,66.694 ; L1.2@72.883,65.203 ccw(c71.679,64.755) v1(71.679,66.04) ; L1.2@72.891,66.875 cw(c71.679,67.337) v1(71.679,66.04) ; L1.2@75.108,73.355 L1.2@75.108,68.529 75.108,66.04 v1(71.679,66.04) ; U3.3@80.058,83.552 v1(82.423,83.552) ; C19.1@89.386,80 cw(c88.74,79.354) 89.654,79.354 ; 89.654,79.151 cw(c90.855,79.151) C19.1@90.006,80 ; C11.2@89.654,85.217 C22.2@89.654,83.058 89.654,80.687 89.654,75.827 v1(95.148,70.333) ; C10.1@91.432,45.212 91.432,44.425 ; PW.7@104.914,44.958 cw(c103.41,44.958) 104.473,43.894 cw(c105.537,42.831) PW.7@105.537,44.335 ; PW.7@105.168,44.958 cw(c104.277,44.958) 104.907,44.328 cw(c105.537,43.698) PW.7@105.537,44.589 ; PW.7@105.798,44.697 cw(c106.428,44.067) 106.428,44.958 cw(c106.428,45.849) PW.7@105.798,45.219 ; PW.7@105.978,44.517 cw(c107.041,43.454) 107.041,44.958 cw(c107.041,46.462) PW.7@105.978,45.399 ; R10.2@106.942,47.371 107.696,47.371 ; PW.5@107.636,44.517 ccw(c106.573,43.454) 106.573,44.958 ccw(c106.573,46.462) 107.636,45.399 ccw(c106.573,46.462) 108.077,46.462 ccw(c109.581,46.462) PW.5@108.518,45.399 ; PW.5@107.816,44.697 ccw(c107.186,44.067) 107.186,44.958 ccw(c107.186,45.849) 107.816,45.219 ccw(c107.186,45.849) 108.077,45.849 ccw(c108.968,45.849) PW.5@108.338,45.219 ; v1(129.616,90.678) CH340.16@129.616,92.177 ; v1(141.961,87.351) 141.965,87.346 USB.1@144.907,87.346 ; v1(142.545,75.667) 142.545,79.045 146.431,82.931 146.431,84.074 ; 143.363,79.863 cw(c145.316,77.91) C12.2@145.316,80.672 ; 143.797,80.297 cw(c145.316,78.777) C12.2@145.316,80.926 ; 144.23,80.73 cw(c145.316,79.645) C12.2@145.316,81.18 ; 144.664,81.164 cw(c145.316,80.512) C12.2@145.316,81.434 ; C12.2@144.996,80.805 cw(c144.222,80.031) 145.316,80.031 cw(c146.41,80.031) C12.2@145.636,80.805 ; C13.1@145.182,79.385 ccw(c144.858,79.709) 145.316,79.709 ; C12.2@145.261,81.435 cw(c146.048,81.435) C12.2@145.491,81.991 ; C13.1@145.316,79.602 ccw(c145.877,79.602) C13.1@145.48,79.205 ; 145.316,80.216 ccw(c146.49,80.216) C13.1@145.66,79.385 ; C12.2@145.316,81.28 145.316,79.226 C13.1@145.421,79.121 ; C12.2@145.515,81.435 cw(c146.915,81.435) 145.925,82.425 ; C12.2@145.769,81.435 cw(c147.782,81.435) 146.359,82.859 ; 145.796,87.346 USB.1@144.907,87.346 ; 146.431,86.711 146.431,84.074 ; 68.953,45.339 cw(c68.953,45.636) 68.743,45.426 ccw(c68.953,45.636) 68.953,45.339 ; 68.953,45.339 ccw(c68.953,45.042) 68.743,45.252 cw(c68.953,45.042) 68.953,45.339 ; 70.55,45.339 cw(c70.55,44.523) 71.127,45.1 ccw(c70.55,44.523) 70.55,45.339 ; 70.55,45.339 ccw(c70.55,46.155) 71.127,45.578 cw(c70.55,46.155) 70.55,45.339 ; 70.859,57.563 cw(c70.649,57.353) 70.946,57.353 ccw(c70.649,57.353) 70.859,57.563 ; 70.859,57.563 ccw(c71.069,57.773) 71.069,57.476 cw(c71.069,57.773) 70.859,57.563 ; 70.899,57.627 ccw(c71.187,57.794) v1@71.101,57.472 ; 70.899,57.627 ccw(c71.187,57.794) v1@71.101,57.472 ; 70.899,57.627 ccw(c71.187,57.794) v1@71.101,57.472 ; 70.924,57.583 cw(c70.698,57.453) v1@70.95,57.385 ; 70.924,57.583 cw(c70.698,57.453) v1@70.95,57.385 ; 70.924,57.583 cw(c70.698,57.453) v1@70.95,57.385 ; 71.976,66.04 cw(c71.976,66.337) 71.766,66.127 ccw(c71.976,66.337) 71.976,66.04 ; 71.976,66.04 ccw(c71.976,65.743) 71.766,65.953 cw(c71.976,65.743) 71.976,66.04 ; 81.559,83.552 cw(c81.559,84.452) 80.922,83.816 ccw(c81.559,84.452) 81.559,83.552 ; 81.559,83.552 ccw(c81.559,82.651) 80.922,83.288 cw(c81.559,82.651) 81.559,83.552 ; 82.126,83.552 cw(c82.126,83.255) 82.336,83.465 ccw(c82.126,83.255) 82.126,83.552 ; 82.126,83.552 ccw(c82.126,83.849) 82.336,83.639 cw(c82.126,83.849) 82.126,83.552 ; 89.654,82.217 cw(c90.47,82.217) 89.893,82.794 ccw(c90.47,82.217) 89.654,82.217 ; 89.654,82.217 ccw(c88.838,82.217) 89.415,82.794 cw(c88.838,82.217) 89.654,82.217 ; 89.654,83.899 cw(c88.838,83.899) 89.415,83.322 ccw(c88.838,83.899) 89.654,83.899 ; 89.654,83.899 ccw(c90.47,83.899) 89.893,83.322 cw(c90.47,83.899) 89.654,83.899 ; 89.654,84.376 cw(c90.47,84.376) 89.893,84.953 ccw(c90.47,84.376) 89.654,84.376 ; 89.654,84.376 ccw(c88.838,84.376) 89.415,84.953 cw(c88.838,84.376) 89.654,84.376 ; 91.432,44.425 cw(c92.123,44.425) 91.659,44.937 ccw(c92.123,44.425) 91.432,44.425 ; 91.432,44.425 ccw(c90.741,44.425) 91.205,44.937 cw(c90.741,44.425) 91.432,44.425 ; 91.432,44.425 92.075,43.782 92.075,42.164 93.079,41.16 101.739,41.16 PW.7@105.537,44.958 PW.5@108.077,44.958 108.077,46.99 107.696,47.371 ; 94.938,70.543 cw(c94.728,70.333) 95.025,70.333 ccw(c94.728,70.333) 94.938,70.543 ; 94.938,70.543 ccw(c95.148,70.753) 95.148,70.456 cw(c95.148,70.753) 94.938,70.543 ; 107.696,47.371 cw(c107.696,48.043) 107.194,47.596 ccw(c107.696,48.043) 107.696,47.371 ; 107.696,47.371 ccw(c107.696,46.699) 107.194,47.146 cw(c107.696,46.699) 107.696,47.371 ; 129.616,90.975 cw(c129.319,90.975) 129.529,90.765 ccw(c129.319,90.975) 129.616,90.975 ; 129.616,90.975 ccw(c129.913,90.975) 129.703,90.765 cw(c129.913,90.975) 129.616,90.975 ; 129.616,91.036 cw(c130.045,91.036) 129.742,91.34 ccw(c130.045,91.036) 129.616,91.036 ; 129.616,91.036 ccw(c129.187,91.036) 129.49,91.34 cw(c129.187,91.036) 129.616,91.036 ; 142.545,75.964 cw(c142.248,75.964) 142.458,75.754 ccw(c142.248,75.964) 142.545,75.964 ; 142.545,75.964 ccw(c142.842,75.964) 142.632,75.754 cw(c142.842,75.964) 142.545,75.964 ; USB.1@144.907,87.346 146.08,87.346 146.431,86.995 146.431,84.074 ; TB6612.20@70.847,57.849 ccw(c71.507,57.849) 71.04,57.382 cw(c71.507,57.849) TB6612.20@70.847,57.849 ; C19.1@89.386,81.29 ccw(c88.74,81.936) 89.654,81.936 cw(c88.74,81.936) C19.1@89.386,81.29 ; 89.654,82.139 ccw(c90.855,82.139) 90.006,81.29 cw(c90.855,82.139) 89.654,82.139 ; v1@142.048,87.264 cw(c142.246,87.065) 142.246,87.346 ccw(c142.246,87.065) v1@142.048,87.264 ; v1@142.048,87.438 ccw(c142.269,87.659) 142.269,87.346 cw(c142.269,87.659) v1@142.048,87.438
  Top Layer w1: AMOTOR1.2@68.453,42.799 68.453,44.704 69.088,45.339 ; 68.656,45.089 ccw(c68.656,45.528) 68.967,45.218 ; 68.778,45.029 ccw(c68.467,45.339) 68.906,45.339 ; 73.455,74.116 ccw(c77.163,74.116) L1.2@75.108,71.029 ; 2596.4@73.455,75.983 ccw(c78.407,75.983) L1.2@75.662,71.862 ; L1.2@75.108,68.529 L1.2@74.199,69.438 ; L1.2@76.216,72.694 cw(c79.651,77.851) 2596.4@73.455,77.851 ; 77.992,82.945 cw(c79.458,81.478) U3.3@79.458,83.552 ; BMOTOR1.2@88.392,42.799 88.392,44.577 89.027,45.212 C10.1@91.432,45.212 ; C19.1@89.654,80.687 C19.1@89.696,80.645 ; C22.2@89.654,83.058 83.185,83.058 82.691,83.552 U3.3@80.058,83.552 78.599,83.552 77.343,82.296 74.803,82.296 73.455,80.948 2596.4@73.455,77.851 ; L1.2@73.455,71.234 ccw(c75.995,71.234) L1.2@74.199,69.438 ; L1.2@73.455,71.234 ccw(c75.995,71.234) L1.2@74.199,69.438 ; L1.2@73.455,71.234 ccw(c75.995,71.234) L1.2@74.199,69.438 ; L1.2@73.455,71.234 ccw(c75.995,71.234) L1.2@74.199,69.438 ; L1.2@73.455,71.234 ccw(c75.995,71.234) L1.2@74.199,69.438 ; L1.2@73.455,71.234 ccw(c75.995,71.234) L1.2@74.199,69.438 ; L1.2@73.455,71.234 ccw(c75.995,71.234) L1.2@74.199,69.438 ; L1.2@73.455,71.234 ccw(c75.995,71.234) L1.2@74.199,69.438 ; L1.2@73.455,71.234 2596.4@73.455,77.851
  Bottom Layer w0.254: v1(68.656,45.339) 68.656,54.94 v1(71.069,57.353) 71.069,65.43 v1(71.679,66.04) ; CSB.1@81.982,96.206 cw(c80.919,95.143) 82.423,95.143 cw(c83.927,95.143) CSB.1@82.864,96.206 ; CSB.1@82.162,96.386 cw(c81.532,95.756) 82.423,95.756 cw(c83.314,95.756) CSB.1@82.684,96.386 ; v1(82.423,83.552) CSB.1@82.423,96.647 ; BMOTOR1.2@87.951,43.24 ccw(c86.888,44.303) 88.392,44.303 ccw(c89.896,44.303) BMOTOR1.2@88.833,43.24 ; BMOTOR1.2@88.131,43.06 ccw(c87.501,43.69) 88.392,43.69 ccw(c89.283,43.69) BMOTOR1.2@88.653,43.06 ; BMOTOR1.2@88.392,42.799 88.392,54.864 95.148,61.62 v1(95.148,70.333) 100.482,75.667 v1(142.545,75.667) ; v1(129.616,90.678) 132.944,87.351 v1(141.961,87.351) ; 68.656,45.636 cw(c68.359,45.636) 68.569,45.426 ccw(c68.359,45.636) 68.656,45.636 ; 68.656,45.636 ccw(c68.953,45.636) 68.743,45.426 cw(c68.953,45.636) 68.656,45.636 ; 70.859,57.143 cw(c71.069,56.933) 71.069,57.23 ccw(c71.069,56.933) 70.859,57.143 ; 70.859,57.143 ccw(c70.649,57.353) 70.946,57.353 cw(c70.649,57.353) 70.859,57.143 ; 71.069,57.65 cw(c70.772,57.65) 70.982,57.44 ccw(c70.772,57.65) 71.069,57.65 ; 71.069,57.65 ccw(c71.366,57.65) 71.156,57.44 cw(c71.366,57.65) 71.069,57.65 ; 71.469,65.83 cw(c71.679,65.62) 71.679,65.917 ccw(c71.679,65.62) 71.469,65.83 ; 71.469,65.83 ccw(c71.259,66.04) 71.556,66.04 cw(c71.259,66.04) 71.469,65.83 ; 82.423,83.849 cw(c82.126,83.849) 82.336,83.639 ccw(c82.126,83.849) 82.423,83.849 ; 82.423,83.849 ccw(c82.72,83.849) 82.51,83.639 cw(c82.72,83.849) 82.423,83.849 ; 95.148,70.036 cw(c95.445,70.036) 95.235,70.246 ccw(c95.445,70.036) 95.148,70.036 ; 95.148,70.036 ccw(c94.851,70.036) 95.061,70.246 cw(c94.851,70.036) 95.148,70.036 ; 95.358,70.543 cw(c95.148,70.753) 95.148,70.456 ccw(c95.148,70.753) 95.358,70.543 ; 95.358,70.543 ccw(c95.568,70.333) 95.271,70.333 cw(c95.568,70.333) 95.358,70.543 ; 129.826,90.468 cw(c130.036,90.678) 129.739,90.678 ccw(c130.036,90.678) 129.826,90.468 ; 129.826,90.468 ccw(c129.616,90.258) 129.616,90.555 cw(c129.616,90.258) 129.826,90.468 ; 141.664,87.351 cw(c141.664,87.054) 141.874,87.264 ccw(c141.664,87.054) 141.664,87.351 ; 141.664,87.351 ccw(c141.664,87.648) 141.874,87.438 cw(c141.664,87.648) 141.664,87.351 ; 142.248,75.667 cw(c142.248,75.37) 142.458,75.58 ccw(c142.248,75.37) 142.248,75.667 ; 142.248,75.667 ccw(c142.248,75.964) 142.458,75.754 cw(c142.248,75.964) 142.248,75.667
pads on no net: 6050.2 6050.3 6050.4 6050.5 6050.6 6050.7 6050.14 6050.15 6050.16 6050.17 6050.19 6050.21 6050.22 BT.14 BT.33 BT.34 CH340.9 CH340.10 CH340.11 CH340.12 CH340.13 CH340.14 CH340.15 S3.3 USB.4 USB.6 USB.7 USB.8 USB.9
copper on no net: | length 7.3
  Top Layer w0.254: 77.572,94.793 80.696,94.793 ; 145.669,60.96 145.762,60.867 cw(c144.731,59.836) 146.189,59.823
  Top Layer w1: 54.779,94.742 57.658,94.742
  other v2: 58.775,57.015 141.275,57.015 58.775,83.015 141.275,83.015
  other v3: 94.539,40.437

## Polygon pours and split planes (outlines as drawn)
GND on Top Layer "Top Layer-No Net" (solid, pour order 8): 49.911,100.203 150.114,100.203 150.114,40.005 150.241,39.878 150.114,40.005 49.657,40.005 49.657,100.33
GND on Bottom Layer "Top Layer-No Net" (solid, pour order 4): 149.987,99.949 50.038,99.949 50.038,40.132 49.911,40.005 149.987,40.005 149.987,99.822 150.114,99.949

## Keep-outs
Keep-Out Layer:
  lines w0.254: 50,42.066 50,97.879 cw(c52.121,97.879) 52.121,100 147.955,100 ; 50.026,42.066 ccw(c52.214,42.066) 52.214,39.878 147.993,39.878 ccw(c147.993,41.91) 150.025,41.91 150.025,97.88 ccw(c147.905,97.88) 147.905,100

## Other copper
Top Layer:
  rectangle net GND: 51.943,49.911 54.864,51.435
  rectangle net VCC5V: 76.327,66.675 78.994,70.485
  rectangle net Net5_2: 64.516,66.802 66.548,70.612
  rectangle net 12V: 51.943,56.896 54.864,57.912

## Silkscreen, mask and mechanical layers (free items; w line width, h text height)
Top Overlay:
  text "5V" at 81.534,93.853 h1.1
  text "A10" at 137.668,93.853 h1.1
  text "A9" at 141.097,93.853 h1.1
  text "GND" at 73.152,93.726 h1.1
  text "B0" at 76.581,93.726 h1.1
  text "B1" at 79.248,93.726 h1.1
  text "GND" at 94.91,93.599 h1.1
  text "3.3" at 98.339,93.599 h1.1
  text "C15" at 101.387,93.599 h1.1
  text "C14" at 104.435,93.599 h1.1
  text "C13" at 107.61,93.599 h1.1
  text "B4" at 111.039,93.599 h1.1
  text "PWMA" at 79.756,69.342 h1.1
  text "A11" at 87.376,69.215 h1.1
  text "AIN2" at 79.883,66.675 h1.1
  text "B12" at 87.503,66.675 h1.1
  text "CLK" at 142.24,64.389 h1.2
  text "B13" at 87.503,64.135 h1.1
  text "AIN1" at 80.137,64.008 h1.1
  text "DIO" at 142.24,61.849 h1.2
  text "B14" at 87.503,61.722 h1.1
  text "BIN1" at 80.137,61.595 h1.1
  text "SDA" at 111.252,61.595 h1.1 r90
  text "B15" at 87.503,59.182 h1.1
  text "GND" at 142.113,59.182 h1.2
  text "BIN2" at 79.883,59.055 h1.1
  text "SCL" at 111.252,58.293 h1.1 r90
  text "PWMB" at 79.629,56.388 h1.1
  text "A8" at 87.376,56.261 h1.1
  text "GND" at 111.252,54.864 h1.1 r90
  text "3.3" at 107.823,51.943 h1.1
  text "3.3" at 145.161,50.8 h1.1
  text "GND" at 117.856,43.942 h1.1
  text "3.3" at 121.285,43.942 h1.1
  text "A3" at 124.333,43.942 h1.1
  text "A2" at 126.873,43.942 h1.1
  text "A7" at 129.54,43.942 h1.1
  text "GND" at 114.808,41.783 h1.1
  text "O2" at 78.232,40.259 h1.1
  text "B7" at 92.583,40.259 h1.1
  text "GND" at 94.869,40.259 h1.1
  text "O4" at 98.171,40.259 h1.1
  text "O1" at 65.024,40.132 h1.1
  text "5V" at 67.183,40.132 h1.1
  text "A0" at 70.104,40.132 h1.1
  text "A1" at 72.517,40.132 h1.1
  text "GND" at 74.676,40.132 h1.1
  text "O3" at 84.582,40.132 h1.1
  text "5V" at 87.503,40.132 h1.1
  text "B6" at 90.043,40.132 h1.1

## Text inside footprints (layer, text, board x,y; h text height)
BT: Top Overlay "SPP-CA" at 129.662,51.834 h4 r90; Top Overlay "FORBID COPPER" at 121.912,71.584 h1; Top Overlay "KEEP OUT" at 124.412,73.334 h1
J1: Top Overlay "VBAT" at 52.197,84.836 h1.2; Top Overlay "GND" at 58.547,93.726 h1.2 r90
PW: Top Overlay "GND" at 100.711,41.529 h1.2; Top Overlay "5V" at 101.854,44.323 h1.2; Top Overlay "3.3" at 114.681,44.704 h1.2